# Altium PCB ETR_CELLMETER_MASTER.PcbDoc (part 2 of 3)
Units mm, origin at the board's own origin, x right, y up, seen from the top; angles counter-clockwise.
Board outline 110 x 70.06 mm, 4 copper layers (Top Layer, Top Inner, Bottom Inner, Bottom Layer), stack 0.96 mm thick; 181 components, 86 nets, 555 pads, 321 vias.
Unrouted connection lines stored in the file: 15.
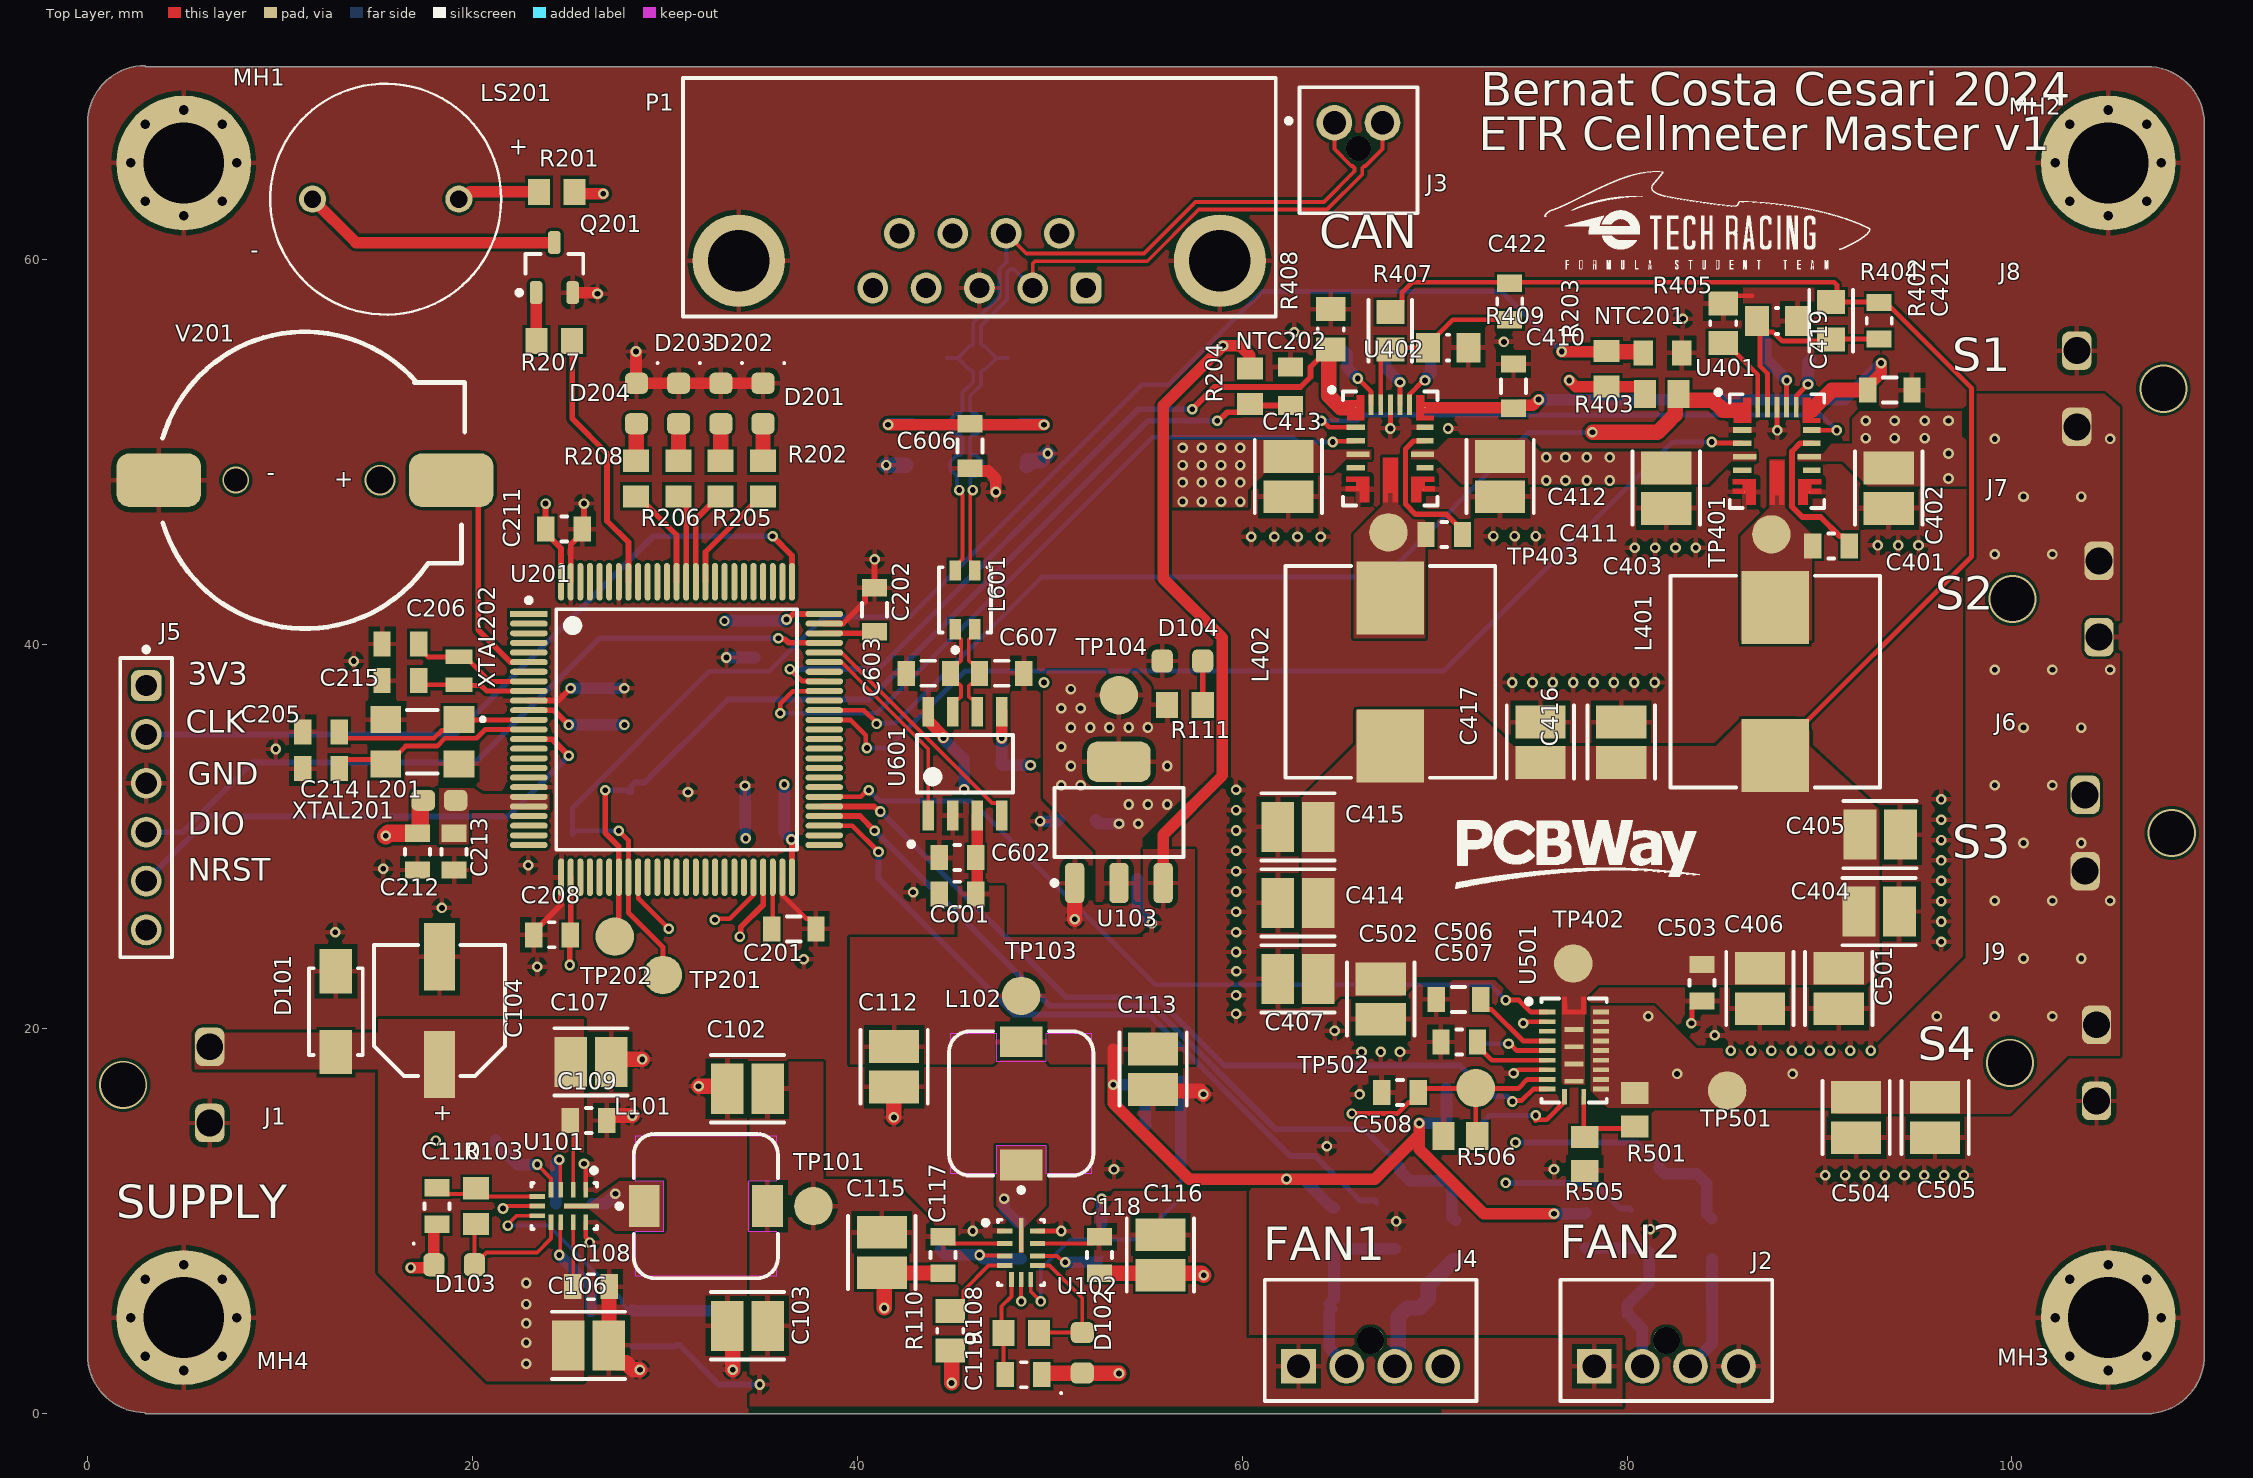
[diagram p0: Top Layer view]

## Part data (continued)
D301 D302 D601 D602: library part CMP-00154-1, "TVS diode [Würth Elektronik] 824501600 TVS diode", Clamping Voltage=10.3V, Forward Voltage=7.02V, Manufacturer="Wurth Electronics", Manufacturer Part Number=824501600, Max Operating Temperature=150°C, Min Operating Temperature=-65°C, Peak Pulse Current=38.8A, Peak Pulse Power=400W, Power Line Protection=No, Resistor Type=Zener, Reverse Standoff Voltage=6V, .Creator=DO, Category="TVS Diodes", ComponentLink1Description="Where buy it", ComponentLink1URL=https://www.we-online.com/catalog/en/WE-TVSP?sq=824501600#824501600, ComponentLink2Description=http://www.farnell.com/datasheets/2036401.pdf?src-supplier=Element14, ComponentLink2URL=http://www.farnell.com/datasheets/2036401.pdf?src-supplier=Element14, ComponentLink3Description=https://katalog.we-online.de/pbs/datasheet/824501600.pdf?src-supplier=Digi-Key, ComponentLink3URL=https://katalog.we-online.de/pbs/datasheet/824501600.pdf?src-supplier=Digi-Key, Design Item ID=DTVS-6V-DO-214AC, Min Breakdown Voltage=7.02V, Mount="Surface Mount", Number of Bidirectional Channels=1, Packaging="Cut Tape", Pins=2, Polarity=Bidirectional, Pricing 1="1=0,28000, 10=0,26100, 50=0,26100, 100=0,23400, 500=0,20400, 1000=0,17400, 10000=0,17400 (USD)", REACH SVHC=Unknown, RoHS=Yes, RoHS Compliant=Yes, Source="Filter components.SchLib", Stock 1=780
J1 J6 J7 J8 J9: library part CMP-002-00003-2, "179838-2", Max Operating Temperature=105°C, Min Operating Temperature=-30°C, Connector Type=Power,Rectangular, Design Item ID="Power 2 pin connector", Mounting Technology=Board, RoHS Compliant=Yes, Source=Electromechanical.SchLib
J2 J4: library part CMP-00027-1, "Conn HDR 4 POS 2.5mm Solder ST Thru-Hole 4 Terminal 1 Port Nano-Fit Tray", Manufacturer 1=Molex, Manufacturer Part Number 1=105309-2104, .Creator=DR, Category="Headers and Wire Housings", Design Item ID=J_NanoFit_1x4_V_W, Pricing 1="1=1,30000, 10=1,15000, 25=1,11000, 50=1,07000, 100=1,02000, 250=0,94400 (USD)", RoHS=No, Source=Electromechanical.SchLib, Stock 1=1183
J3: library part CMP-002-00001-2, "Conn HDR 2 POS 2.5mm Solder ST Thru-Hole 2 Terminal 1 Port Nano-Fit Tray"
J5: library part J_STLink_STM32_PinHeader_1x6
L101: library part CMP-006-00002-2, "General Purpose Inductor, 3.3uH, 20%, 1 Element, Ferrite-Core, SMD. 744777003", Max Current Rating=5A, Max Operating Temperature=125°C, Min Operating Temperature=-40°C, Self Resonant Frequency=55MHz, Tolerance=20%, Pins=2, RoHS Compliant=Yes
L102: library part CMP-006-00004-1, "General Purpose Inductor, 2.2uH, 20%, 1 Element, Ferrite-Core, SMD. 744777002", Max Current Rating=6A, Max Operating Temperature=125°C, Min Operating Temperature=-40°C, Self Resonant Frequency=60MHz, Tolerance=20%, Pins=2, RoHS Compliant=Yes
L201: library part CMP-00166-1, Case Code (Imperial)=0603, Case Code (Metric)=1608, Current Rating=500mA, DC Resistance (DCR)=210mR, Manufacturer=Murata, Manufacturer Part Number=BLM18EG331TN1D, Max Operating Temperature=125°C, Min Operating Temperature=-55°C, Package Quantity=1, Resistance=0.21, Test Frequency=100MHz, Tolerance=25%, .Creator=GP, Case/Package=0603, Category="Ferrite Beads and Chips", ComponentLink1Description=https://datasheet.ciiva.com/1467/5169-1467232.pdf?src-supplier=Element14, ComponentLink1URL=https://datasheet.ciiva.com/1467/5169-1467232.pdf?src-supplier=Element14, ComponentLink2Description=https://datasheet.ciiva.com/11795/0900766b811b5866-11795405.pdf?src-supplier=RSComponents, ComponentLink2URL=https://datasheet.ciiva.com/11795/0900766b811b5866-11795405.pdf?src-supplier=RSComponents, ComponentLink3Description=https://datasheet.ciiva.com/41449/001172267-da-01-en-drossel-0603-330r-1-6x0-8mm-4000st-41449581.pdf?src-supplier=Conrad, ComponentLink3URL=https://datasheet.ciiva.com/41449/001172267-da-01-en-drossel-0603-330r-1-6x0-8mm-4000st-41449581.pdf?src-supplier=Conrad, ComponentLink4Description=https://datasheet.ciiva.com/1467/5169-1467233.pdf?src-supplier=Element14, ComponentLink4URL=https://datasheet.ciiva.com/1467/5169-1467233.pdf?src-supplier=Element14, ComponentLink5Description=https://datasheet.ciiva.com/1561/5169-1561345.pdf?src-supplier=Newark, ComponentLink5URL=https://datasheet.ciiva.com/1561/5169-1561345.pdf?src-supplier=Newark, ComponentLink6Description=https://datasheet.ciiva.com/3082/l0110s0101blm18e-3082714.pdf?src-supplier=Avnet, ComponentLink6URL=https://datasheet.ciiva.com/3082/l0110s0101blm18e-3082714.pdf?src-supplier=Avnet, ComponentLink7Description=https://datasheet.ciiva.com/6211/l0110s0101blm18e-6211470.pdf?src-supplier=Digi-Key, ComponentLink7URL=https://datasheet.ciiva.com/6211/l0110s0101blm18e-6211470.pdf?src-supplier=Digi-Key, ComponentLink8Description=https://datasheet.ciiva.com/6211/l0110s0101blm18e-6211471.pdf?src-supplier=Digi-Key, ComponentLink8URL=https://datasheet.ciiva.com/6211/l0110s0101blm18e-6211471.pdf?src-supplier=Digi-Key, Core Material=Ferrite, Depth=0.8mm, Design Item ID=L_Ferrite_bead_782853561, Height=0.8mm, Impedance=330R, Lead Free="Lead Free", Length=1.6mm, Material=Ferrite,Steel, Max Current Rating=500mA, Max DC Current=500mA, Number of Circuits=1, Number of Lines=1, Number of Pins=2, Packaging="Tape and Reel", Pricing 1="1=0,23000, 10=0,17500, 25=0,14520, 50=0,12520, 100=0,11260, 250=0,09508, 500=0,08508, 1000=0,07257 (USD)", REACH SVHC="No SVHC", RoHS=Yes, RoHS Compliant=Yes, Series=BLM18E, Source="Filter components.SchLib", Stock 1=20037, Termination=SMD/SMT, Width=0.8mm
L401 L402: library part CMP-006-00000-2, "General Purpose Inductor, 1uH, 20%, 4242", Max Current Rating=14A, Max Operating Temperature=150°C, Min Operating Temperature=-40°C, Self Resonant Frequency=69MHz, Tolerance=20%, RoHS Compliant=Yes
L601: library part CMP-006-00001-1, "Cmc 51UH 200MA 2LN SMD AEC-Q200"
LS201: library part CMP-003-00001-1, "12 mm, 5 Vdc, 90 dB, 3.1 kHz, Through Hole, Magnetic Audio Indicator Buzzer", Case/Package="TO-220 CUI Inc.", Availability=Unavailable, CUI_purchase_URL=https://www.cuidevices.com/product/audio/buzzers/audio-indicators/cmi-1275c-050?utm_source=snapeda.com&utm_medium=referral&utm_campaign=snapedaBOM, Design Item ID=Buzzer_CMI-1275C-050, DigiKey-Purchase-URL=https://snapeda.com/shop?store=DigiKey&id=2772244, MF="CUI Devices", Mouser-Purchase-URL=https://snapeda.com/shop?store=Mouser&id=2772244, MP=CMI-1275C-050, Price=None, SnapEDA_Link=https://www.snapeda.com/parts/CMI-1275C-050/CUI%20Devices/view-part/2772244/?ref=snap, Source=CommonFiles_Library.SchLib
MH1 MH2 MH3 MH4: library part CMP-00041-6, "Mounting Hole M4", Design Item ID=Mounting_Hole_M4, Source=Electromechanical.SchLib
NTC201 NTC202: library part CMP-010-00001-1, "NTC 0805 package 10kR"
P1: library part CMP-002-00005-1, "D Type Connector, 9 Contact(s), Male, Solder Terminal, Locking, Receptacle", Max Operating Temperature=85°C, Min Operating Temperature=-40°C, Mounting Technology=Board, RoHS Compliant=Yes
Q201: library part CMP-00148-1, "ON Semi BC817-25LT1G NPN Bipolar Transistor; 0.5 A; 45 V; 3-Pin SOT-23", Case/Package=SOT-23-3, Collector Base Voltage (VCBO)=50V, Collector Emitter Breakdown Voltage=45V, Collector Emitter Saturation Voltage=700mV, Current Rating=500mA, Emitter Base Voltage (VEBO)=5V, Frequency=100MHz, Package Quantity=1, Power Dissipation=300mW, .Creator=GP, Category=Transistor, Collector Emitter Voltage (VCEO)=45V, Collector-emitter Voltage-Max=700mV, ComponentLink1Description=Datasheet, ComponentLink2Description="Where buy it", ComponentLink3Description=https://datasheet.ciiva.com/27748/2010413-27748829.pdf?src-supplier=Jameco, ComponentLink3URL=https://datasheet.ciiva.com/27748/2010413-27748829.pdf?src-supplier=Jameco, ComponentLink4Description=https://datasheet.ciiva.com/15138/getdatasheetpartid-38405-15138602.pdf?src-supplier=Verical, ComponentLink4URL=https://datasheet.ciiva.com/15138/getdatasheetpartid-38405-15138602.pdf?src-supplier=Verical, ComponentLink5Description=https://datasheet.ciiva.com/1196/bc817-16lt1-d-1196558.pdf?src-supplier=Element14, ComponentLink5URL=https://datasheet.ciiva.com/1196/bc817-16lt1-d-1196558.pdf?src-supplier=Element14, ComponentLink6Description=https://datasheet.ciiva.com/22641/bc817-16lt1-d-22641013.pdf?src-supplier=Farnell, ComponentLink6URL=https://datasheet.ciiva.com/22641/bc817-16lt1-d-22641013.pdf?src-supplier=Farnell, ComponentLink7Description=https://datasheet.ciiva.com/22664/bc817-16lt1-d-22664204.pdf?src-supplier=Element14, ComponentLink7URL=https://datasheet.ciiva.com/22664/bc817-16lt1-d-22664204.pdf?src-supplier=Element14, ComponentLink8Description=https://datasheet.ciiva.com/22664/1842041-22664101.pdf?src-supplier=Element14, ComponentLink8URL=https://datasheet.ciiva.com/22664/1842041-22664101.pdf?src-supplier=Element14, ComponentLink9Description=https://datasheet.ciiva.com/4722/bc817-16lt1-d-104560-4722229.pdf?src-supplier=Mouser, ComponentLink9URL=https://datasheet.ciiva.com/4722/bc817-16lt1-d-104560-4722229.pdf?src-supplier=Mouser, ComponentLink10Description=https://datasheet.ciiva.com/1195/bc817-16lt1-d-1195763.pdf?src-supplier=Element14, ComponentLink10URL=https://datasheet.ciiva.com/1195/bc817-16lt1-d-1195763.pdf?src-supplier=Element14, ComponentLink11Description=https://datasheet.ciiva.com/1195/bc817-16lt1-d-1195764.pdf?src-supplier=Element14, ComponentLink11URL=https://datasheet.ciiva.com/1195/bc817-16lt1-d-1195764.pdf?src-supplier=Element14, ComponentLink12Description=https://datasheet.ciiva.com/11197/bc817-16lt1-d-11197514.pdf?src-supplier=Avnet, ComponentLink12URL=https://datasheet.ciiva.com/11197/bc817-16lt1-d-11197514.pdf?src-supplier=Avnet, ComponentLink13Description=https://datasheet.ciiva.com/25996/bc817-16lt1-d-25996327.pdf?src-supplier=Avnet+Europe, ComponentLink13URL=https://datasheet.ciiva.com/25996/bc817-16lt1-d-25996327.pdf?src-supplier=Avnet+Europe, ComponentLink14Description=https://datasheet.ciiva.com/976/bc817-16lt1-d-976357.pdf?src-supplier=Digi-Key, ComponentLink14URL=https://datasheet.ciiva.com/976/bc817-16lt1-d-976357.pdf?src-supplier=Digi-Key, ComponentLink15Description=https://datasheet.ciiva.com/976/bc817-16lt1-d-976358.pdf?src-supplier=Digi-Key, ComponentLink15URL=https://datasheet.ciiva.com/976/bc817-16lt1-d-976358.pdf?src-supplier=Digi-Key, ComponentLink16Description=https://datasheet.ciiva.com/976/bc817-16lt1-d-976356.pdf?src-supplier=Digi-Key, ComponentLink16URL=https://datasheet.ciiva.com/976/bc817-16lt1-d-976356.pdf?src-supplier=Digi-Key, Contact Plating=Tin,Matte, Design Item ID=TRT-NPN-0.5/45-SOT23, Element Configuration=Single, Gain Bandwidth Product=100MHz, Halogen Free="Halogen Free", Height=0.94mm, hFE Min=160, Lead Free="Lead Free", Length=2.9mm, Max Breakdown Voltage=45V, Max Collector Current=500mA, Max Frequency=100MHz, Number of Elements=1, Number of Pins=3, Pricing 1="1=0,20000, 10=0,18500, 100=0,10080, 500=0,06204, 1000=0,04229 (USD)", Radiation Hardening=No, REACH SVHC="No SVHC", RoHS Compliant=Yes, Series=-, Source=Semiconductor.SchLib, Transition Frequency=100MHz, Width=1.3mm
Q301 Q302: library part CMP-013-00002-1, "Mosfet, N-channel, 40V, 7A, SOT-23 Rohs Compliant: Yes"
R101 R102 R106 R107 R303 R306 R501 R502 R504 R505 R506: library part CMP-009-00003-2, "Fixed Resistor, Metal Glaze/thick Film, 0.125W, 100000ohm, 150V, 5% +/-Tol, 200ppm/Cel, Surface Mount, 0805", Case/Package=0805, Max Operating Temperature=155°C, Min Operating Temperature=-55°C, Power=125mW, Tolerance=5%, Mounting Technology="Surface Mount", Pins=2, RoHS Compliant=Yes
R103 R108: library part CMP-00076-1, "Res Thick Film 0805 1K Ohm 5% 1/8W ±200ppm/°C Molded SMD SMD Paper Tape on Plastic Reel", Case Code (Metric)=2012, Case/Package=0805, Manufacturer 1=Bourns, Manufacturer Part Number 1=CR0805-JW-102ELF, Max Operating Temperature=155°C, Max Power Dissipation=125mW, Min Operating Temperature=-55°C, Package Quantity=1, Resistor Type="Thick Film", Temperature Coefficient=200ppm/°C, Tolerance=5%, Voltage Rating=150V, .Creator=GP, Category="Chip SMD Resistors", ComponentLink1Description=https://datasheet.ciiva.com/11821/0900766b80fcdb72-11821134.pdf?src-supplier=RSComponents, ComponentLink1URL=https://datasheet.ciiva.com/11821/0900766b80fcdb72-11821134.pdf?src-supplier=RSComponents, ComponentLink2Description=https://datasheet.ciiva.com/15225/getdatasheetpartid-78155-15225381.pdf?src-supplier=Verical, ComponentLink2URL=https://datasheet.ciiva.com/15225/getdatasheetpartid-78155-15225381.pdf?src-supplier=Verical, ComponentLink3Description=https://datasheet.ciiva.com/22693/1902866-22693253.pdf?src-supplier=Element14, ComponentLink3URL=https://datasheet.ciiva.com/22693/1902866-22693253.pdf?src-supplier=Element14, ComponentLink4Description=https://datasheet.ciiva.com/7986/1856384-7986184.pdf?src-supplier=Element14, ComponentLink4URL=https://datasheet.ciiva.com/7986/1856384-7986184.pdf?src-supplier=Element14, ComponentLink5Description=https://datasheet.ciiva.com/7985/1856384-7985867.pdf?src-supplier=Element14, ComponentLink5URL=https://datasheet.ciiva.com/7985/1856384-7985867.pdf?src-supplier=Element14, ComponentLink6Description=https://datasheet.ciiva.com/30242/159chpreztr-30242765.pdf?src-supplier=Onlinecomponents.com, ComponentLink6URL=https://datasheet.ciiva.com/30242/159chpreztr-30242765.pdf?src-supplier=Onlinecomponents.com, ComponentLink7Description=https://datasheet.ciiva.com/6547/chpreztr-6547359.pdf?src-supplier=Digi-Key, ComponentLink7URL=https://datasheet.ciiva.com/6547/chpreztr-6547359.pdf?src-supplier=Digi-Key, Contact Plating=Tin, Depth=1.25mm, Design Item ID=R1k-0805FTK, Features="Moisture Resistant", Height=0.5mm, Lead Free="Lead Free", Length=2mm, Military Standard=Not, Mount="Surface Mount", Number of Terminations=2, Packaging="Tape and Reel", Pins=2, Power rating=125mW, Pricing 1="1=0,05930, 10=0,03510, 25=0,01790, 100=0,00800, 250=0,00790, 500=0,00590, 1000=0,00360, 3000=0,00350, 6000=0,00250 (USD)", Radiation Hardening=No, REACH SVHC="No SVHC", RoHS=Yes, Source=Passives.SchLib, Stock 1=27510, Termination=SMD/SMT, Thickness=508um, Voltage Rating (DC)=150V, Width=1.25mm
R104: library part CMP-009-00014-2, "Fixed Resistor, Thin Film, 0.1W, 7150ohm, 100V, 0.1% +/-Tol, 10ppm/Cel, Surface Mount, 0805", Case/Package=0805, Max Operating Temperature=125°C, Min Operating Temperature=-55°C, Power=100mW, Tolerance=0.1%, Mounting Technology="Surface Mount", Pins=2, RoHS Compliant=Yes
R105 R110 R405 R410 R503: library part CMP-009-00005-1, "Fixed Resistor, Metal Glaze/thick Film, 0.125W, 15000ohm, 150V, 1% +/-Tol, 100ppm/Cel, Surface Mount, 0805", Case/Package=0805, Max Operating Temperature=155°C, Min Operating Temperature=-55°C, Power=125mW, Tolerance=1%, Mounting Technology="Surface Mount", Pins=2, RoHS Compliant=No
R109: library part CMP-009-00013-1, "Fixed Resistor, Thin Film, 0.125W, 19100ohm, 100V, 0.1% +/-Tol, 15ppm/Cel, Surface Mount, 0805. ERA6APB1912V", Case/Package=0805, Max Operating Temperature=155°C, Min Operating Temperature=-55°C, Power=125mW, Tolerance=0.1%, Mounting Technology="Surface Mount", Pins=2, RoHS Compliant=Yes
R111: library part R100-0805FTK, "Res Thick Film 0805 100 Ohm 1% 1/8W ±100ppm/°C Molded SMD SMD Paper Tape on Plastic Reel", Case Code (Imperial)=0805, Case Code (Metric)=2012, Manufacturer 1=Bourns, Max Operating Temperature=155°C, Max Power Dissipation=125mW, Min Operating Temperature=-55°C, Package Quantity=1, Resistance=100R, Resistance Tolerance=1%, Resistor Type="Thick Film", Temperature Coefficient=100ppm/°C, Voltage Rating=150V, .Creator=DR, Case/Package=0805, Category="Chip SMD Resistors", ComponentLink1Description=https://datasheet.ciiva.com/11809/0900766b80fcdb72-11809178.pdf?src-supplier=RSComponents, ComponentLink1URL=https://datasheet.ciiva.com/11809/0900766b80fcdb72-11809178.pdf?src-supplier=RSComponents, ComponentLink2Description=https://datasheet.ciiva.com/6547/chpreztr-6547413.pdf?src-supplier=Digi-Key, ComponentLink2URL=https://datasheet.ciiva.com/6547/chpreztr-6547413.pdf?src-supplier=Digi-Key, ComponentLink3Description=https://datasheet.ciiva.com/6547/chpreztr-6547414.pdf?src-supplier=Digi-Key, ComponentLink3URL=https://datasheet.ciiva.com/6547/chpreztr-6547414.pdf?src-supplier=Digi-Key, ComponentLink4Description=https://datasheet.ciiva.com/6547/chpreztr-6547415.pdf?src-supplier=Digi-Key, ComponentLink4URL=https://datasheet.ciiva.com/6547/chpreztr-6547415.pdf?src-supplier=Digi-Key, ComponentLink5Description=https://datasheet.ciiva.com/9120/chpreztr-9120744.pdf?src-supplier=Avnet, ComponentLink5URL=https://datasheet.ciiva.com/9120/chpreztr-9120744.pdf?src-supplier=Avnet, Construction=Rectangular, Contact Plating=Tin, Depth=1.25mm, Features="Moisture Resistant", Height=0.5mm, Length=2mm, Manufacturer Part Number 1=CR0805-FX-1000ELF, Military Standard=Not, Mount="Surface Mount", Number of Pins=2, Number of Terminations=2, Packaging="Tape and Reel", Power rating=125mW, Pricing 1="1=0,05840, 10=0,03430, 25=0,01780, 100=0,00750, 250=0,00560, 500=0,00490, 3000=0,00470 (USD)", Radiation Hardening=No, REACH SVHC="No SVHC", RoHS=Yes, RoHS Compliant=Yes, Series=CR0805, Stock 1=49802, Supplier 1="Arrow Electronics", Supplier Part Number 1=CR0805-FX-1000ELF, Technology="THICK FILM", Termination=SMD/SMT, Thickness=508um, Tolerance=1%, Voltage Rating (DC)=150V, Width=1.25mm
R201 R202 R205 R206 R208: library part CMP-00093-1, "Res Thick Film 0805 470 Ohm 1% 1/8W ±100ppm/°C Molded SMD SMD Paper Tape on Plastic Reel", Case Code (Metric)=2012, Case/Package=0805, Manufacturer 1=Bourns, Manufacturer Part Number 1=CR0805-FX-4700GLF, Max Operating Temperature=155°C, Max Power Dissipation=125mW, Min Operating Temperature=-55°C, Resistance Tolerance=1%, Resistor Type="Thick Film", Temperature Coefficient=100ppm/°C, Voltage Rating=150V, .Creator=DR, Category="Chip SMD Resistors", ComponentLink1Description=https://datasheet.ciiva.com/11808/0900766b80fcdb72-11808686.pdf?src-supplier=RSComponents, ComponentLink1URL=https://datasheet.ciiva.com/11808/0900766b80fcdb72-11808686.pdf?src-supplier=RSComponents, ComponentLink2Description=https://datasheet.ciiva.com/7985/1856384-7985880.pdf?src-supplier=Element14, ComponentLink2URL=https://datasheet.ciiva.com/7985/1856384-7985880.pdf?src-supplier=Element14, ComponentLink3Description=https://datasheet.ciiva.com/22693/1902866-22693247.pdf?src-supplier=Element14, ComponentLink3URL=https://datasheet.ciiva.com/22693/1902866-22693247.pdf?src-supplier=Element14, ComponentLink4Description=https://datasheet.ciiva.com/5541/chpreztr-5541930.pdf?src-supplier=Mouser, ComponentLink4URL=https://datasheet.ciiva.com/5541/chpreztr-5541930.pdf?src-supplier=Mouser, Construction=Rectangular, Contact Plating=Tin, Depth=1.25mm, Design Item ID=R470-0805FTK, Features="Moisture Resistant", Height=0.5mm, Length=2mm, Military Standard=Not, Mount="Surface Mount", Number of Terminations=2, Packaging="Tape and Reel", Pins=2, Power rating=125mW, Pricing 1="1=0,00990, 10=0,00980, 25=0,00950, 50=0,00940, 100=0,00930, 250=0,00920, 500=0,00910, 1000=0,00890, 3000=0,00870, 6000=0,00860 (USD)", Radiation Hardening=No, REACH SVHC="No SVHC", RoHS=Yes, Series=CR0805, Source=Passives.SchLib, Stock 1=12623, Technology="THICK FILM", Termination=SMD/SMT, Thickness=508um, Tolerance=1%, Voltage Rating (DC)=150V
R203 R204 R207 R302 R305: library part CMP-00085-1, "BOURNS         CR0805-JW-103ELF            Surface Mount Chip Resistor, Thick Film, CR Series, 10 kohm, 125 mW,  5%, 150 V", Case Code (Metric)=2012, Case/Package=0805, Manufacturer 1=Bourns, Manufacturer Part Number 1=CR0805-JW-103ELF, Max Operating Temperature=155°C, Max Power Dissipation=125mW, Min Operating Temperature=-55°C, Package Quantity=1, Resistance Tolerance=5%, Resistor Type="Thick Film", Temperature Coefficient=200ppm/°C, Voltage Rating=150V, Voltage Rating (DC)=100V, .Creator=DR, Category="Chip SMD Resistors", ComponentLink1Description=https://datasheet.ciiva.com/11821/0900766b80fcdb72-11821135.pdf?src-supplier=RSComponents, ComponentLink1URL=https://datasheet.ciiva.com/11821/0900766b80fcdb72-11821135.pdf?src-supplier=RSComponents, ComponentLink2Description=https://datasheet.ciiva.com/9122/chpreztr-9122374.pdf?src-supplier=Avnet, ComponentLink2URL=https://datasheet.ciiva.com/9122/chpreztr-9122374.pdf?src-supplier=Avnet, ComponentLink3Description=https://datasheet.ciiva.com/22693/1902866-22693254.pdf?src-supplier=Element14, ComponentLink3URL=https://datasheet.ciiva.com/22693/1902866-22693254.pdf?src-supplier=Element14, ComponentLink4Description=https://datasheet.ciiva.com/7986/691949-7986187.pdf?src-supplier=Element14, ComponentLink4URL=https://datasheet.ciiva.com/7986/691949-7986187.pdf?src-supplier=Element14, ComponentLink5Description=https://datasheet.ciiva.com/30065/159chpreztr-30065976.pdf?src-supplier=Onlinecomponents.com, ComponentLink5URL=https://datasheet.ciiva.com/30065/159chpreztr-30065976.pdf?src-supplier=Onlinecomponents.com, ComponentLink6Description=https://datasheet.ciiva.com/16783/70154685-16783482.pdf?src-supplier=Allied+Electronics, ComponentLink6URL=https://datasheet.ciiva.com/16783/70154685-16783482.pdf?src-supplier=Allied+Electronics, ComponentLink7Description=https://datasheet.ciiva.com/5548/chpreztr-5548491.pdf?src-supplier=Mouser, ComponentLink7URL=https://datasheet.ciiva.com/5548/chpreztr-5548491.pdf?src-supplier=Mouser, ComponentLink8Description=https://datasheet.ciiva.com/6559/chpreztr-6559900.pdf?src-supplier=Digi-Key, ComponentLink8URL=https://datasheet.ciiva.com/6559/chpreztr-6559900.pdf?src-supplier=Digi-Key, ComponentLink9Description=https://datasheet.ciiva.com/6559/chpreztr-6559901.pdf?src-supplier=Digi-Key, ComponentLink9URL=https://datasheet.ciiva.com/6559/chpreztr-6559901.pdf?src-supplier=Digi-Key, ComponentLink10Description=https://datasheet.ciiva.com/7985/1856384-7985869.pdf?src-supplier=Element14, ComponentLink10URL=https://datasheet.ciiva.com/7985/1856384-7985869.pdf?src-supplier=Element14, ComponentLink11Description=https://datasheet.ciiva.com/48692/001055517-da-01-en-smd-wid-cr0805-jw-103elf-10k-ohm-1-8w-48692118.pdf?src-supplier=Conrad, ComponentLink11URL=https://datasheet.ciiva.com/48692/001055517-da-01-en-smd-wid-cr0805-jw-103elf-10k-ohm-1-8w-48692118.pdf?src-supplier=Conrad, Construction=Rectangular, Contact Plating=Tin, Depth=1.25mm, Design Item ID=R10k-0805FTK, Features="Moisture Resistant", Height=0.5mm, Length=2mm, Military Standard=Not, Mount="Surface Mount", Number of Terminations=2, Packaging="Tape and Reel", Pins=2, Power rating=125mW, Pricing 1="1=0,05790, 10=0,01540, 25=0,01340, 100=0,00340 (USD)", Radiation Hardening=No, REACH SVHC="No SVHC", RoHS=Yes, RoHS Compliant=Yes, Series=CR0805, Source=Passives.SchLib, Stock 1=57566, Technology="THICK FILM", Termination=SMD/SMT, Thickness=508um, Tolerance=5%, Width=1.25mm
R301 R304: library part CMP-009-00018-1, "Fixed Resistor, Metal Glaze/thick Film, 0.125W, 51000ohm, 150V, 1% +/-Tol, 100ppm/Cel, Surface Mount, 0805. ERJ-6ENF5102V", Case/Package=0805, Max Operating Temperature=155°C, Min Operating Temperature=-55°C, Power=125mW, Tolerance=1%, Mounting Technology="Surface Mount", Pins=2, RoHS Compliant=Yes
R401 R403 R406: library part CMP-009-00003-1, "Fixed Resistor, Metal Glaze/thick Film, 0.125W, 100000ohm, 150V, 5% +/-Tol, 200ppm/Cel, Surface Mount, 0805", Case/Package=0805, Max Operating Temperature=155°C, Min Operating Temperature=-55°C, Power=125mW, Tolerance=5%, Mounting Technology="Surface Mount", Pins=2, RoHS Compliant=Yes
R402 R407: library part CMP-009-00001-1, "Fixed Resistor, Metal Glaze/thick Film, 0.125W, 60400ohm, 150V, 1% +/-Tol, 100ppm/Cel, Surface Mount, 0805", Case/Package=0805, Max Operating Temperature=155°C, Min Operating Temperature=-55°C, Power=125mW, Tolerance=1%, Mounting Technology="Surface Mount", Pins=2, RoHS Compliant=Yes
R404 R409: library part CMP-009-00051-1, "Thick Film Resistors - SMD 1/8watt 5.3Kohms 1% Non Standard", Case/Package=0805, Max Operating Temperature=155°C, Min Operating Temperature=-55°C, Power=125mW, Tolerance=1%, ComponentLink1Description=Datasheet, ComponentLink1URL=https://www.vishay.com/docs/20008/dcrcw.pdf, Mounting Technology="Surface Mount", Pins=2, RoHS Compliant=Yes
R408: library part CMP-009-00046-1, "Fixed Resistor, Metal Glaze/thick Film, 0.125W, 12400ohm, 150V, 1% +/-Tol, 100ppm/Cel, Surface Mount, 0805", Max Operating Temperature=155°C, Min Operating Temperature=-55°C, Power=125mW, Tolerance=1%, Case/Package=0805, Mounting Technology="Surface Mount", Pins=2, RoHS Compliant=Yes